# Altium PCB Reciever PCB.pcbdoc
Units mm, origin at the board's own origin, x right, y up, seen from the top; angles counter-clockwise.
Board outline 64.52 x 59.69 mm, 2 copper layers (Top Layer, Bottom Layer); 7 components, 18 nets, 42 pads, 0 vias.
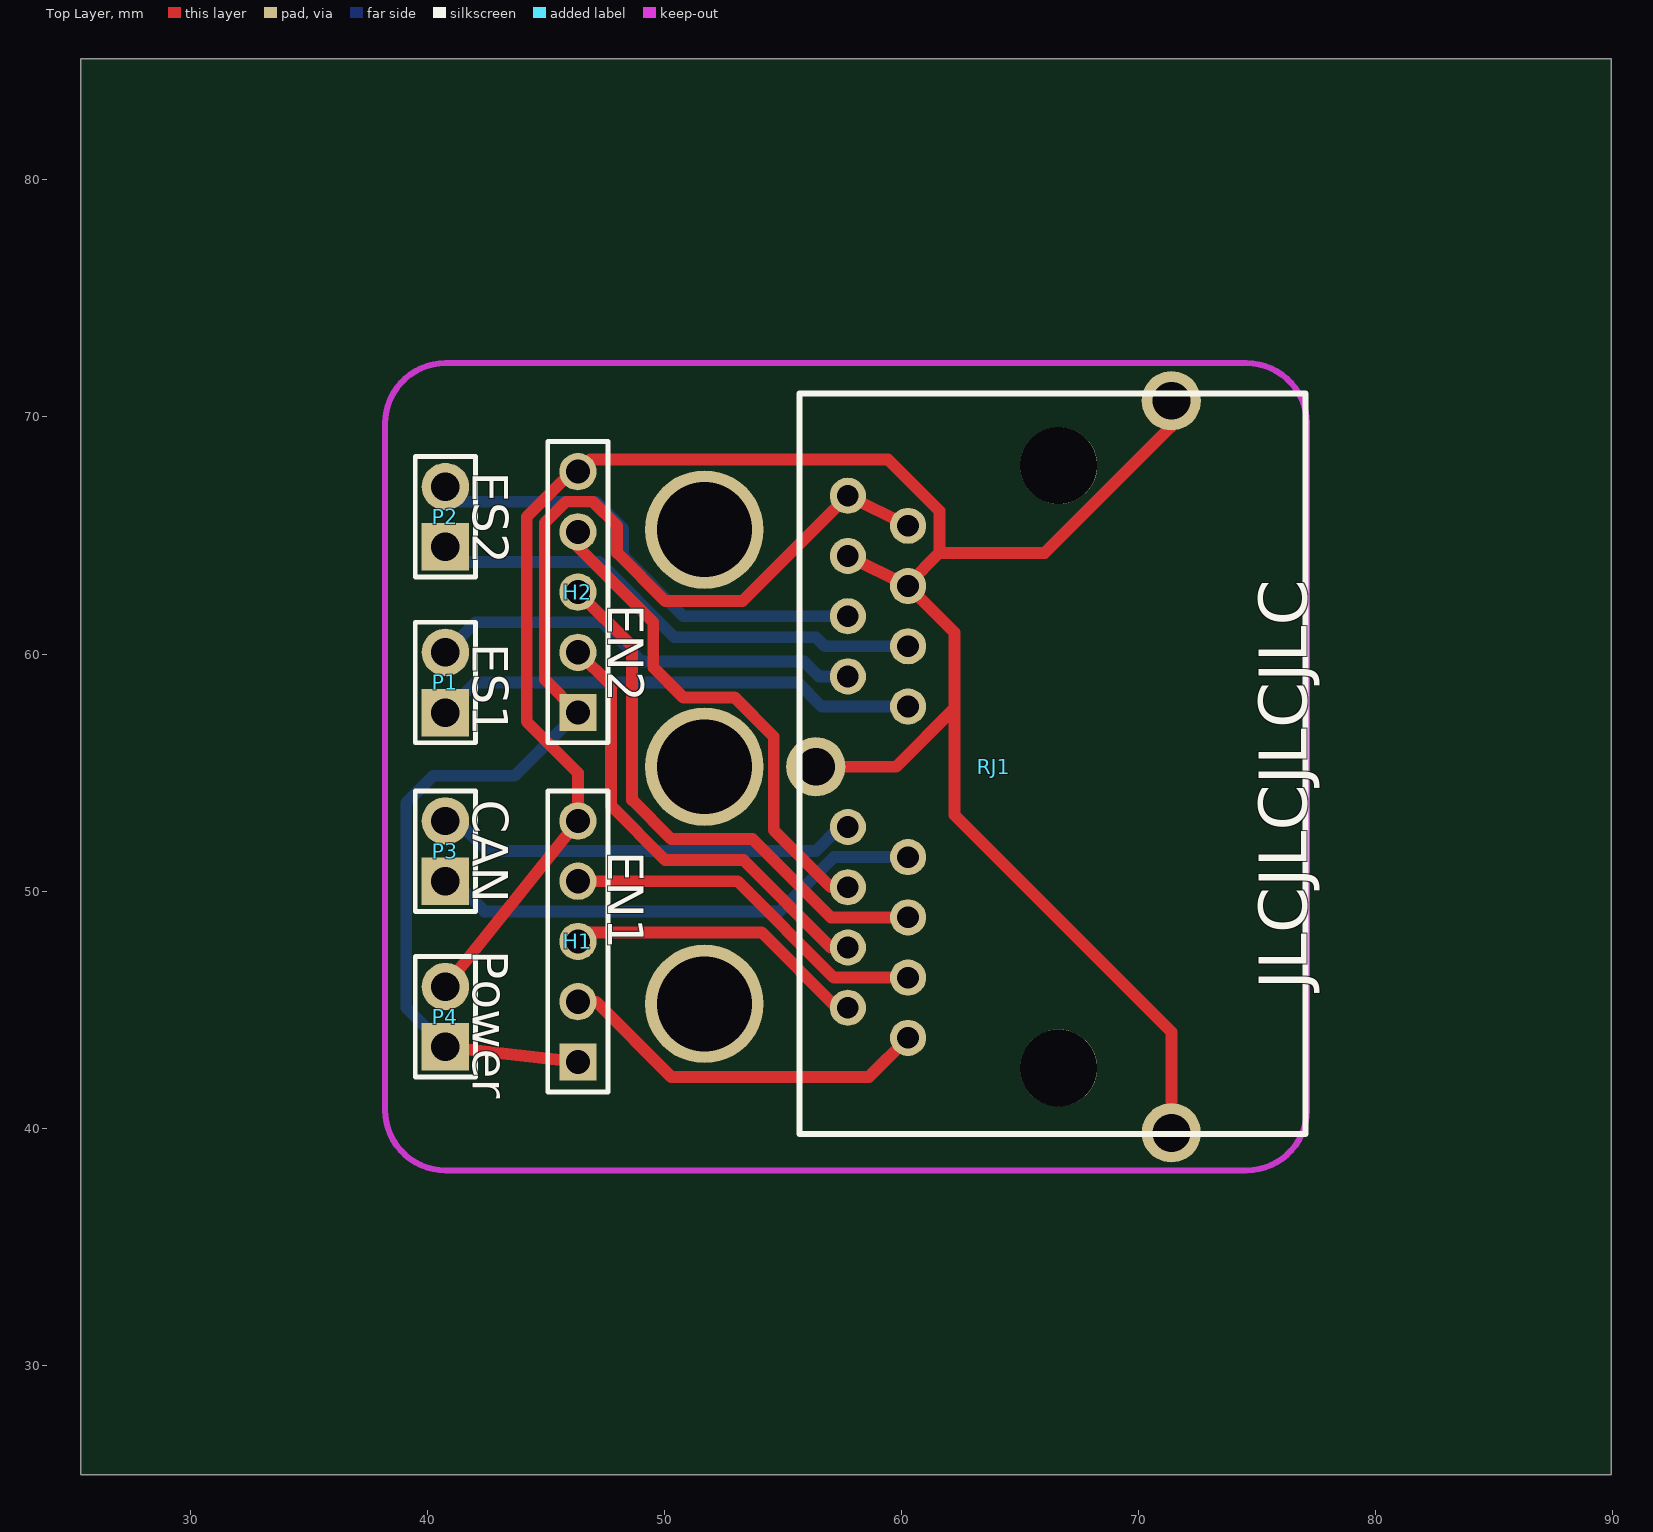
[diagram p0: Top Layer view]
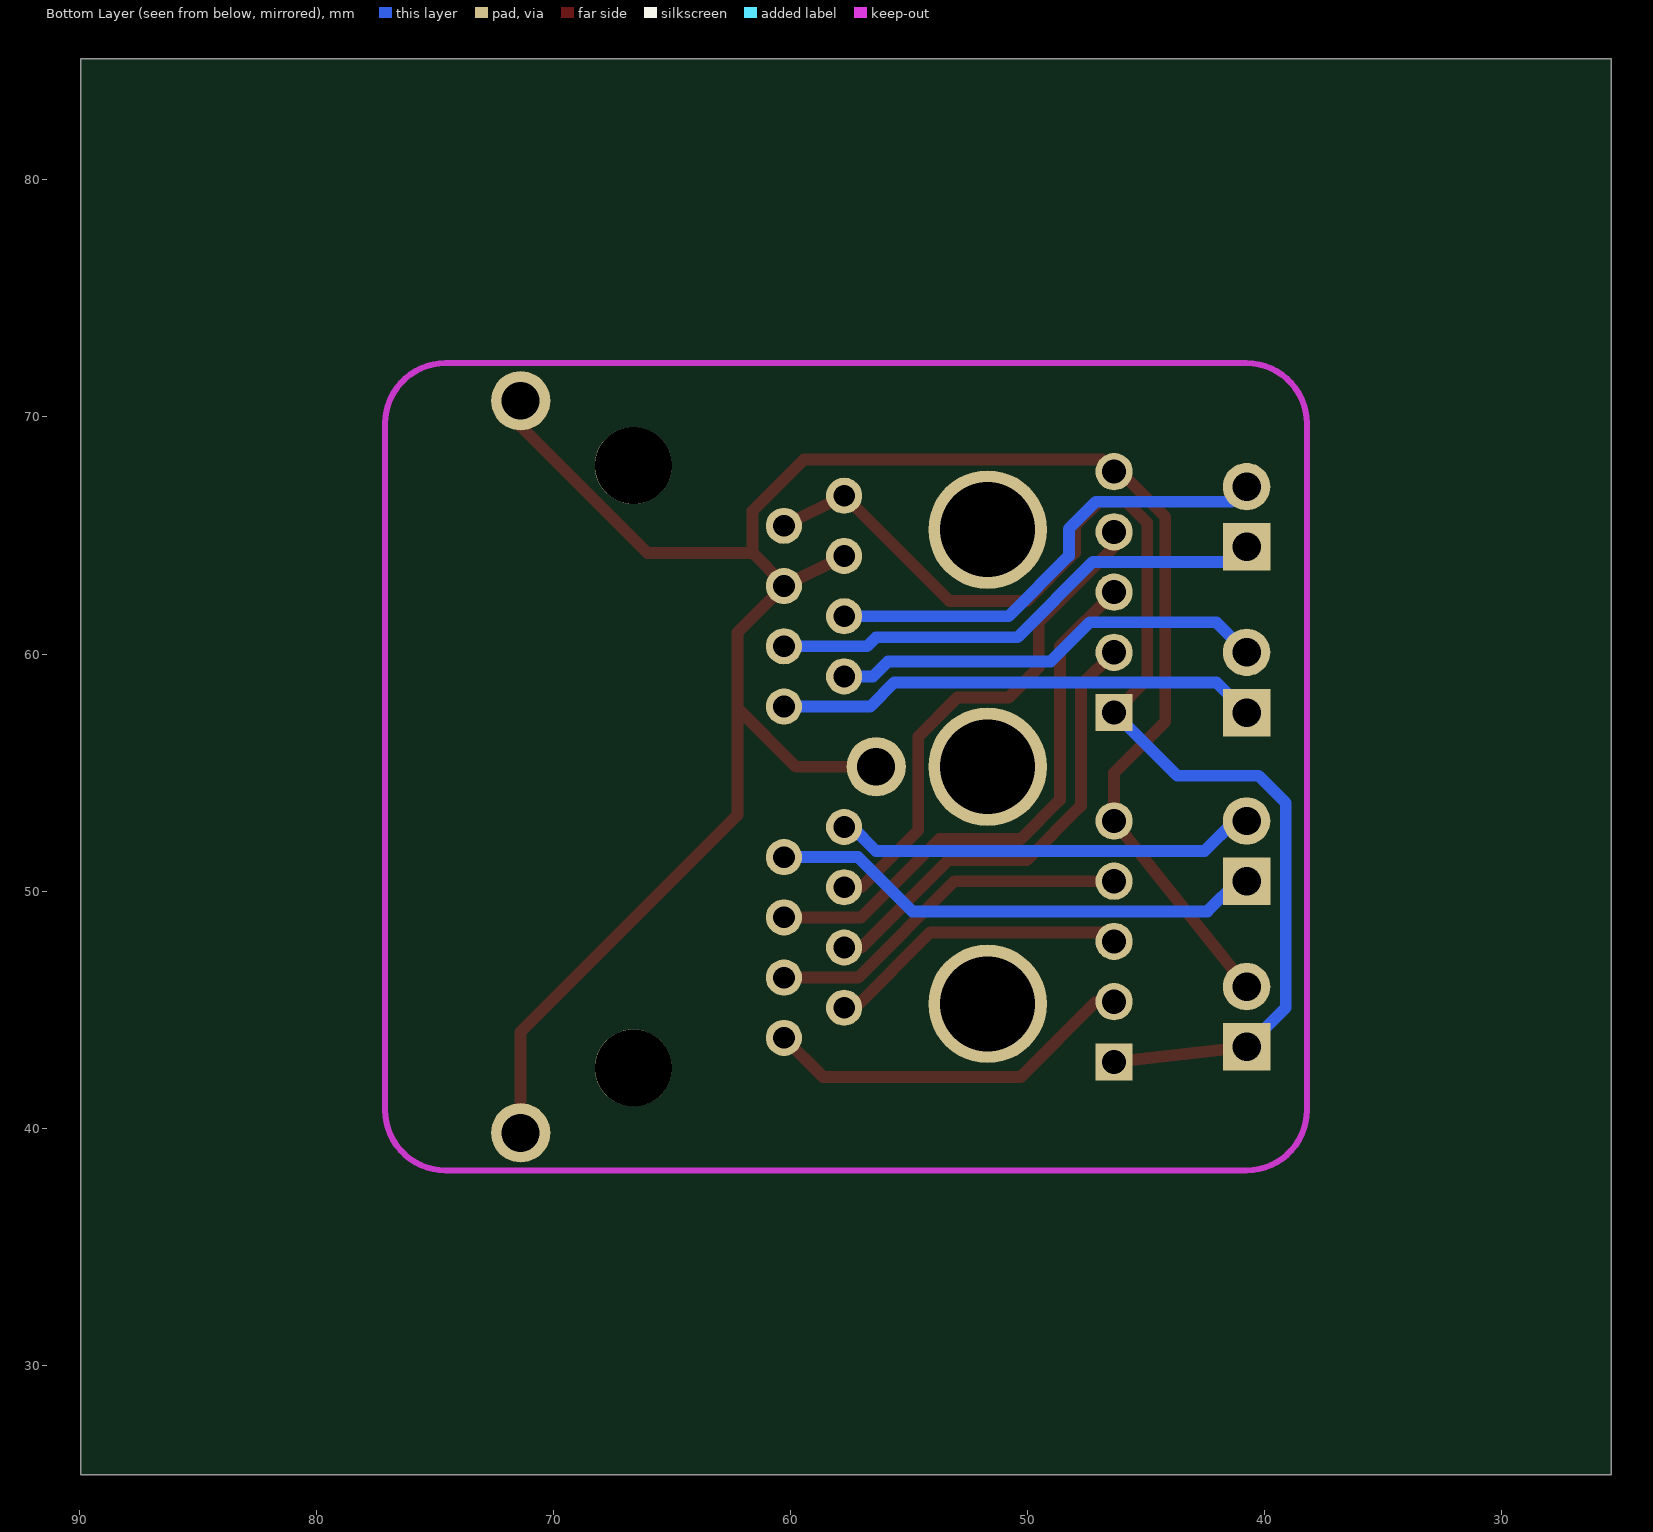
[diagram p1: Bottom Layer view, seen from below]

## Layer stack, top to bottom
Top Layer: signal copper (thickness not stored)
Dielectric: dielectric 0.32, FR-4, Dk 4.8
Bottom Layer: signal copper (thickness not stored)

## Board outline
89.916,25.4 25.4,25.4 25.4,85.09 89.916,85.09

## Components (designator, comment, footprint, x,y, rotation, side; value= is the part's Value field where it differs from the comment)
H1 "EN1" HDR-5X1/2.54 46.355,47.879 r90 top
H2 "EN2" HDR-5X1/2.54 46.355,62.611 r90 top
P1 "ES1" HDR-TH_2P-P2.54-V-M 40.767,58.801 r90 top
P2 "ES2" HDR-TH_2P-P2.54-V-M 40.767,65.786 r90 top
P3 "CAN" HDR-TH_2P-P2.54-V-M 40.767,51.689 r90 top
P4 "Power" HDR-TH_2P-P2.54-V-M 40.767,44.704 r90 top
RJ1 "DS1129-05-S80BP-X" RJ45-TH_DS1129-05-S80BP-X 63.881,55.245 r90 top

## Footprints (in the part's own frame and the unit in brackets; to place one, negate y for a bottom-side part, rotate by r counter-clockwise, add the part's x,y. Pads: shape width x height; smd on the part's side, far side on the other; paste and mask are expansions set on the pad)
HDR-5X1/2.54 [mil]
  rect 62x62 hole 40.16: 1(-200,0)
  round 62 hole 40.16: 2(-100,0) 3(0,0) 4(100,0) 5(200,0)
  silkscreen extent -250,-50 250,50
HDR-TH_2P-P2.54-V-M [mm]
  rect 2x2 hole 1.2: 1(-1.27,0)
  round 2 hole 1.2: 2(1.27,0)
  silkscreen extent -2.54,-1.27 2.54,1.27
RJ45-TH_DS1129-05-S80BP-X [mil]
  round 60 hole 36: 1(-449.99,141.93) 2(-399.99,241.93) 3(-349.99,141.93) 4(-299.99,241.93) 5(-249.99,141.93) 6(-199.99,241.93) 7(-149.99,141.93) 8(-99.99,241.93) 9(100.01,141.93) 10(150.01,241.93) 11(200.01,141.93) 12(250.01,241.93) 13(300.01,141.93) 14(350.01,241.93) 15(400.01,141.93) 16(450.01,241.93)
  round 98.42 hole 62.99: 17(-607.67,-295.08) 18(607.68,-295.08) 19(0.01,295.08)
  round 127.95 hole 127.95 unplated: ""(-500,-108.07) ""(500,-108.07)
  silkscreen extent -610,-518 620,322

## Free pads (board coordinates)
  round 5 hole 4: 1(51.689,45.245) 1(51.689,55.245) 1(51.689,65.245)

## Nets (pads, with @x,y where several pads share a name; then routed paths per layer and width w, separated by ;. In a path a pad name is that pad's centre, name@x,y a point inside that pad or via, vN(x,y) a via of type N, cw(c..) or ccw(c..) an arc to the next point about the centre after c; other vN are vias at no path point)
1.1: H1.2 RJ1.1 | length 15.9
  Top Layer w0.5: H1.2 47.117,45.339 50.292,42.164 58.625,42.164 RJ1.1
1.2: H1.3 RJ1.2 | length 12.9
  Top Layer w0.5: H1.3 46.736,48.26 54.102,48.26 57.277,45.085 RJ1.2
1.3: H1.4 RJ1.3 | length 15.6
  Top Layer w0.5: H1.4 53.086,50.419 57.15,46.355 RJ1.3
1.4: H2.2 RJ1.4 | length 19.5
  Top Layer w0.5: H2.2 47.752,58.674 47.752,53.594 50.038,51.308 53.34,51.308 57.023,47.625 RJ1.4
1.5: H2.3 RJ1.5 | length 23.4
  Top Layer w0.5: H2.3 48.641,60.325 48.641,53.848 50.292,52.197 53.721,52.197 57.023,48.895 RJ1.5
1.6: H2.4 RJ1.6 | length 21.4
  Top Layer w0.5: H2.4 46.355,64.516 49.53,61.341 49.53,59.436 50.8,58.166 52.959,58.166 54.61,56.515 54.61,52.578 57.023,50.165 RJ1.6
2.1: P1.1 RJ1.9 | length 20.5
  Bottom Layer w0.5: P1.1 42.037,58.801 55.626,58.801 56.642,57.785 RJ1.9
2.2: P1.2 RJ1.10 | length 18.4
  Bottom Layer w0.5: P1.2 42.037,61.341 47.371,61.341 49.022,59.69 55.88,59.69 56.515,59.055 RJ1.10
2.3: P2.1 RJ1.11 | length 21.2
  Bottom Layer w0.5: P2.1 41.402,63.881 47.244,63.881 50.419,60.706 56.388,60.706 56.769,60.325 RJ1.11
2.4: P2.2 RJ1.12 | length 19.9
  Bottom Layer w0.5: P2.2 41.402,66.421 47.117,66.421 48.26,65.278 48.26,64.135 50.8,61.595 RJ1.12
2.5: H1.5 H2.5 P4.2 RJ1.13 RJ1.14 RJ1.17 RJ1.18 RJ1.19 | length 96.1
  Top Layer w0.5: P4.2 H1.5 46.355,54.991 44.196,57.15 44.196,65.786 46.101,67.691 H2.5 46.863,68.199 59.436,68.199 61.595,66.04 61.595,64.262 ; RJ1.19 59.772,55.245 62.23,57.703 ; RJ1.14 RJ1.13 ; RJ1.17 71.376,44.067 62.23,53.213 62.23,60.911 RJ1.13 ; RJ1.18 71.377,69.599 66.04,64.262 61.595,64.262 ; RJ1.13 60.276,62.943 61.595,64.262
2.8: H1.1 H2.1 P4.1 RJ1.15 RJ1.16 | length 54.2
  Top Layer w0.5: P4.1 H1.1 ; H2.1 44.958,58.928 44.958,65.532 45.847,66.421 46.99,66.421 48.006,65.405 48.006,64.262 50.038,62.23 53.291,62.23 RJ1.16 RJ1.15
  Bottom Layer w0.5: P4.1 39.116,45.085 39.116,53.721 40.259,54.864 43.688,54.864 H2.1
CANH: P3.2 RJ1.8 | length 17.9
  Bottom Layer w0.5: P3.2 41.275,52.959 42.545,51.689 56.388,51.689 57.404,52.705 RJ1.8
CANL: P3.1 RJ1.7 | length 21
  Bottom Layer w0.5: P3.1 41.148,50.419 42.418,49.149 54.356,49.149 54.864,49.149 57.15,51.435 RJ1.7
S$335: 
S$337: 
S$339: 
S$342: 
pads on no net: RJ1.

## Keep-outs
Keep-Out Layer:
  lines w0.254: 38.227,40.767 ccw(c40.767,40.767) 40.767,38.227 ; 38.227,69.723 cw(c40.767,69.723) 40.767,72.263 ; 74.549,38.227 ccw(c74.549,40.767) 77.089,40.767 ; 74.549,72.263 cw(c74.549,69.723) 77.089,69.723

## Silkscreen, mask and mechanical layers (free items; w line width, h text height)
Top Overlay:
  text "ES2" at 41.922,67.691 h1.5 r270
  text "EN2" at 47.637,62.103 h1.5 r270
  text "ES1" at 41.922,60.452 h1.5 r270
  text "CAN" at 41.922,53.848 h1.5 r270
  text "EN1" at 47.637,51.689 h1.5 r270
  text "Power" at 41.922,47.498 h1.5 r270
  text "JLCJLCJLCJLC" at 77.089,45.847 h2.03 r90
Document:
  lines w0.003: 57.633,55.22 57.683,55.27